# EAGLE board N Mosfet as Switch (EAGLE 9.7.0)

Size 82.88 x 58.33 mm. Coordinates in mm from the lower left corner, seen from the top.
Outline: 0,0 82.88,0 82.88,58.33 0,58.33 0,0
Copper layers (1*16): Top 0.035mm / dielectric 1.5mm / Bottom 0.035mm
Design rules "default": minimum track width 6mil, minimum drill 0.35mm, track to track 6mil, track to pad 6mil, pad to pad 6mil, via to via 6mil, smd to smd 6mil, copper to edge 40mil, drill to drill 6mil, minimum pad ring 10mil, minimum via ring 8mil, stop-mask expansion 4mil, vias tented up to drill 0mil, thermal gap 10mil

## Footprints (pad centres in the part's own frame; a part is rotated, then mirrored left to right if it is on the bottom)
BATTERY-GENERIC = drill 1.118 pad 3.15 octagon: + 2.54,0; - -2.54,0
LEDRD254W60D565H860B_W = drill 0.981 pad 1.581: 1 -1.27,0; 2 1.27,0
RESAD1016W63L850D250B = drill 0.83 pad 1.43: 1 -5.08,0; 2 5.08,0
HA-06-SM065 = drill 1 pad 1.676: 1 -2.54,-2.54; 2 0,2.54; 3 2.54,-2.54
TO220BV = drill 1.016 long: D 0,-2.54; G -2.54,-2.54; S 2.54,-2.54

## Placement (x,y rotation side)
BAT3  9V  [BATTERY-GENERIC]  74.63,8.26 270 top
D1  WHITE  [LEDRD254W60D565H860B_W]  25.1,45.09 180 top
R2  1k  [RESAD1016W63L850D250B]  26.37,29.84 90 top
RPOT1  250k  [HA-06-SM065]  7.05,51.28 0 top
T2  NMOSFET  [TO220BV]  31.45,47.62 0 top

## Library data of the parts
BAT3 R2 RPOT1 = Tinkercad
D1 = Tinkercad; CATEGORY: Opto-Electronic; SUB-CATEGORY: LED; VALUE: LED_WHITE
T2 = Tinkercad; CATEGORY: Transistor; SUB-CATEGORY: MOSFET; TYPE: N-Channel

## Nets
BAT3+: BAT3.+ R2.1 RPOT1.1
BAT3-: BAT3.- RPOT1.3 T2.S
D1_A: D1.1 R2.2
D1_C: D1.2 T2.D
T2_G: RPOT1.2 T2.G

## Tracks (layer width: path | path; a pad name or v marks a point on that pad's centre or on a via)
BAT3+  (2 unrouted)
BAT3-  (2 unrouted)
D1_A  (1 unrouted)
D1_C  (1 unrouted)
T2_G  (1 unrouted)